# Altium PCB 2020210905jiajunli.PcbDoc
Units mm, origin at the board's own origin, x right, y up, seen from the top; angles counter-clockwise.
Board outline 130 x 100 mm, 2 copper layers (Top Layer, Bottom Layer); 54 components, 39 nets, 173 pads, 12 vias.
Unrouted connection lines stored in the file: 7.
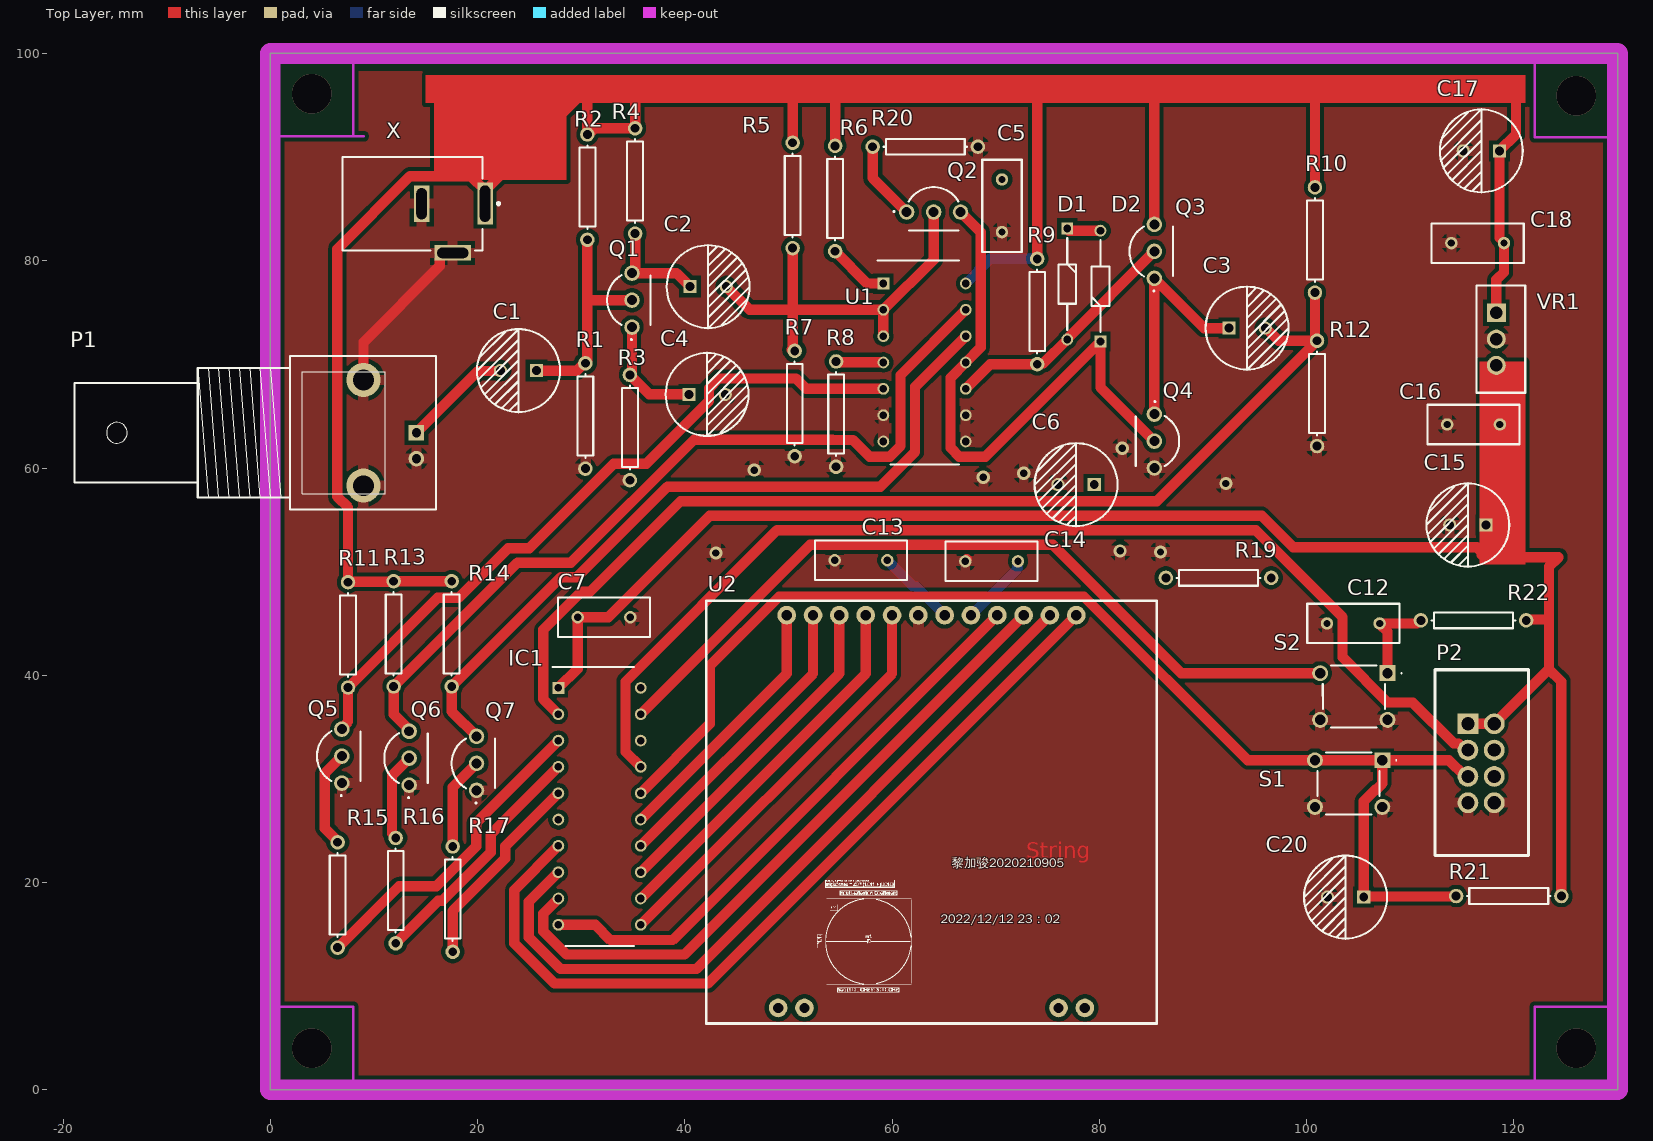
[diagram p0: Top Layer view]
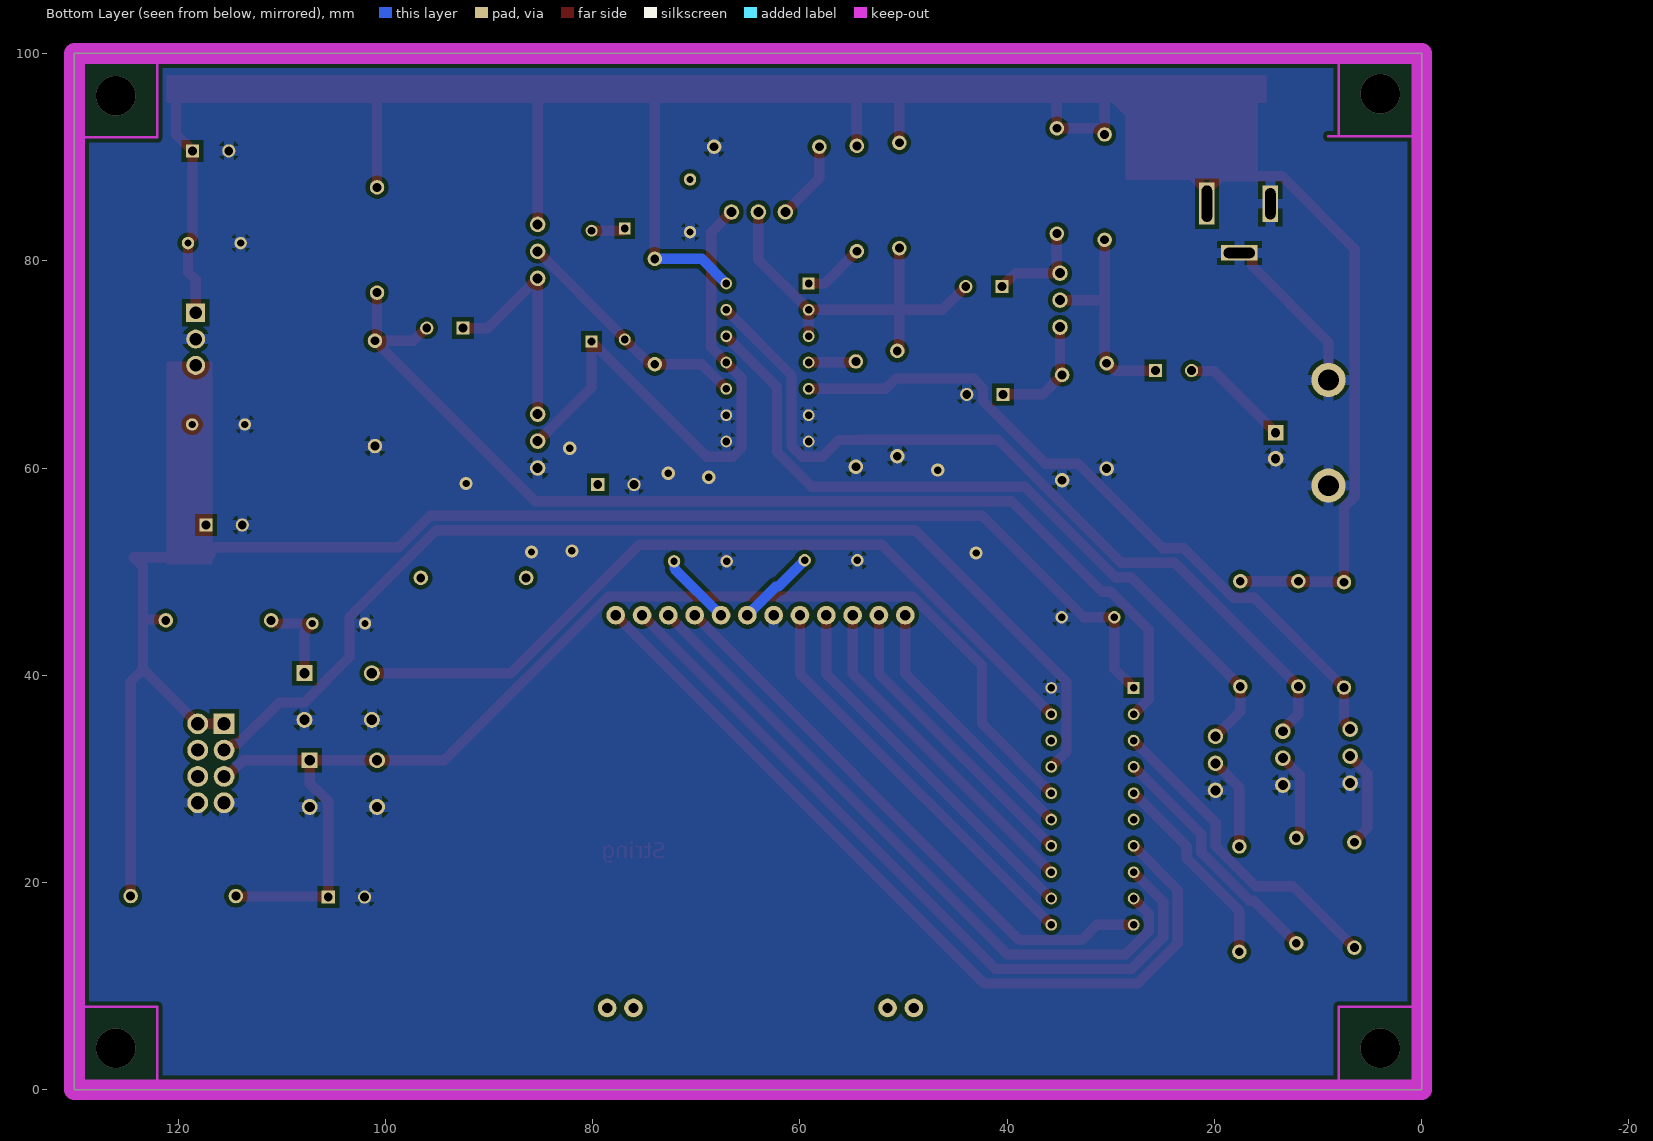
[diagram p1: Bottom Layer view, seen from below]
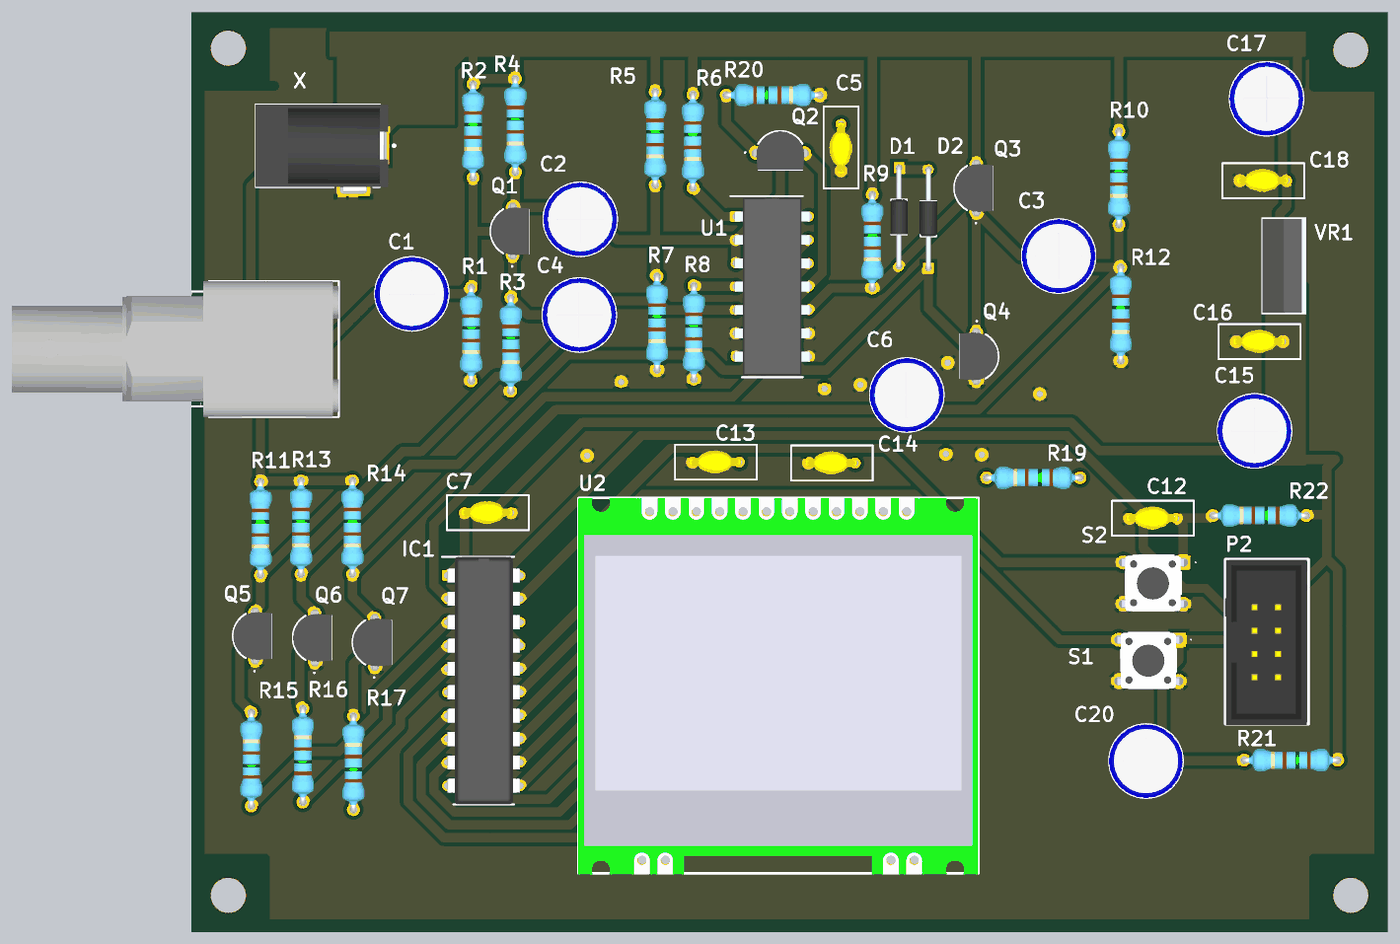
[diagram p2: 3D render of the assembled board from above, using the file's embedded part models]

## Layer stack, top to bottom
Top Solder: solder mask 0.0102, Solder Resist, Dk 3.5
Top Layer: signal copper 0.0356
Dielectric 1: dielectric 0.32, FR-4, Dk 4.8
Bottom Layer: signal copper 0.0356
Bottom Solder: solder mask 0.0102, Solder Resist, Dk 3.5

## Board outline
0,0 130,0 130,100 0,100

## Design rules (kind name [scope] priority, off if disabled: settings)
Clearance Clearance_POLY [InPolygon] p1: gap=0.4 ignorepadtopadclearanceinfootprint=FALSE
Clearance Clearance_1 [All] p2: gap=0.4 ignorepadtopadclearanceinfootprint=FALSE
Clearance Clearance_ANALOG [WithinRoom('ANALOG') vs WithinRoom('ANALOG')] p3: gap=1.2 ignorepadtopadclearanceinfootprint=TRUE
Clearance Clearance_P10 [InNet('P10')] p4: gap=1.2 ignorepadtopadclearanceinfootprint=FALSE
ComponentOrientations [All] p1: allowedrotations=32
HoleSize [All] p1: absolutevalues=TRUE maxlimit=5 minlimit=0.025 maxpercent=80.000 minpercent=20.000
NetsToIgnore [InNet('3V3')] p1:
PermittedLayers [All] p1: toplayerpermitted=TRUE bottomlayerpermitted=FALSE
PolygonConnect [All] p1: connectstyle=Relief reliefconductorwidth=1 reliefentries=4 polygonreliefangle="90 Angle" airgapwidth=0.4
RoomDefinition ANALOG [False vs False] p1: confinementstyle=ConfineIn formatcopy=TRUE lockcomponents=FALSE outline 10.3,95.7 108,95.7 108,54.1 10.3,54.1
RoutingVias [All] p1: holewidth=0.5 width=1 viastyle="Through Hole" minholewidth=0.25 minwidth=0.5 maxholewidth=4 maxwidth=8
SilkToSilkClearance [All] p1: silktosilkclearance=0.2
SilkToSolderMaskClearance [IsPad] p1: minsilkscreentomaskgap=0.2 clearancetoexposedcopper=TRUE
SolderMaskExpansion [All] p1: expansion=0.102 istentingtop=FALSE
Width Width__POWER [All] p1: maxlimit=5 minlimit=1 preferedwidth=1.5
Width Width_ANALOG [WithinRoom('ANALOG')] p2: maxlimit=5 minlimit=0.5 preferedwidth=0.6
Width [InNetClass('POWERClass')] p3: maxlimit=5 minlimit=0.254 preferedwidth=0.4
27 further rules are at their usual default settings.

## Classes and differential pairs
net class POWERClass: 3V3 +12 GND
component class 2020210905-LJJ: C1 C2 C3 C4 C5 C6 D1 D2 P1 Q1 Q2 Q3 Q4 Q5 Q6 Q7 R1 R2 R3 R4 R5 R6 R7 R8 R10 R11 R12 R13 R14 R15 R16 R17 R20 U1
component class 2020210905-DIGTAL: C7 C12 C13 C14 C15 C16 C17 C18 C20 IC1 P2 R19 R21 R22 S1 S2 U2 VR1 X

## Components (designator, comment, footprint, x,y, rotation, side; value= is the part's Value field where it differs from the comment)
C1 "100uF/25V" CAPPRD350W65D800H1250 25.7,69.4 r180 top
C2 "100uF/25V" CAPPRD350W65D800H1250 40.5,77.5 r0 top
C3 "100uF/25V" CAPPRD350W65D800H1250 92.5,73.5 r0 top
C4 "100uF/25V" CAPPRD350W65D800H1250 40.4,67.1 r0 top
C5 "Cap" RAD-0.2-cap 70.6,85.3 r90 top value=100nF
C6 "100uF/25V" CAPPRD350W65D800H1250 79.5,58.4 r180 top
C7 "Cap" RAD-0.2-cap 32.2,45.6 r0 top value=100nF
C12 "Cap" RAD-0.2-cap 104.5,45 r0 top value=100nF
C13 "Cap" RAD-0.2-cap 57,51.1 r0 top value=100nF
C14 "Cap" RAD-0.2-cap 69.6,51 r0 top value=100nF
C15 "100uF/25V" CAPPRD350W65D800H1250 117.3,54.5 r180 top
C16 "Cap" RAD-0.2-cap 116.1,64.2 r0 top value=100nF
C17 "100uF/25V" CAPPRD350W65D800H1250 118.6,90.6 r180 top
C18 "Cap" RAD-0.2-cap 116.5,81.7 r0 top value=100nF
C20 "100uF/25V" CAPPRD350W65D800H1250 105.5,18.6 r180 top
D1 "1N4148" DIOAD1068W53L380D172 76.9,83.1 r270 top
D2 "1N4148" DIOAD1068W53L380D172 80.1,72.2 r90 top
IC1 "MSP430G2553IN20" DIP794W53P254L2540H508Q20N 31.77,27.35 r0 top
P1 "BNC" BNC_RA-CON 14.1,63.4 r0 top
P2 "Header 4X2" IDC-8 115.56,35.32 r270 top
Q1 "SS8050CTA" TO-92-3 34.9,76.2 r90 top
Q2 "SS8050CTA" TO-92-3 64,84.7 r0 top
Q3 "SS8050CTA" TO-92-3 85.3,80.9 r90 top
Q4 "SS8550CTA" TO-92-3 85.3,62.6 r270 top
Q5 "SS8050CTA" TO-92-3 6.9,32.2 r90 top
Q6 "SS8050CTA" TO-92-3 13.4,32 r90 top
Q7 "SS8050CTA" TO-92-3 19.9,31.5 r90 top
R1 "51k" RES-AXIAL-0.4 30.4,65.02 r90 top value=100K
R2 "100k" RES-AXIAL-0.4 30.6,87.1 r90 top value=100K
R3 "1k" RES-AXIAL-0.4 34.7,63.9 r90 top value=100K
R4 "3k" RES-AXIAL-0.4 35.2,87.7 r90 top value=100K
R5 "33k" RES-AXIAL-0.4 50.4,86.3 r90 top value=100K
R6 "20k" RES-AXIAL-0.4 54.5,86 r90 top value=100K
R7 "10k" RES-AXIAL-0.4 50.6,66.22 r90 top value=100K
R8 "18k" RES-AXIAL-0.4 54.6,65.2 r90 top value=100K
R9 "2k" RES-AXIAL-0.4 74,75.1 r90 top value=100K
R10 "11k" RES-AXIAL-0.4 100.8,82 r90 top value=100K
R11 "1k" RES-AXIAL-0.4 7.5,43.9 r90 top value=100K
R12 "1k" RES-AXIAL-0.4 101,67.2 r90 top value=100K
R13 "1k" RES-AXIAL-0.4 11.9,44 r90 top value=100K
R14 "1k" RES-AXIAL-0.4 17.5,44 r90 top value=100K
R15 "1k" RES-AXIAL-0.4 6.5,18.8 r270 top value=100K
R16 "1k" RES-AXIAL-0.4 12.1,19.22 r270 top value=100K
R17 "1k" RES-AXIAL-0.4 17.6,18.4 r270 top value=100K
R19 "1k" RES-AXIAL-0.4 91.5,49.4 r0 top value=100K
R20 "2k" RES-AXIAL-0.4 63.2,91 r180 top value=100K
R21 "1k" RES-AXIAL-0.4 119.5,18.7 r0 top value=100K
R22 "1k" RES-AXIAL-0.4 116.1,45.3 r0 top value=100K
S1 "SW-PB" FSM18JH 107.3,31.8 r0 top
S2 "SW-PB" FSM18JH 107.8,40.2 r0 top
U1 "CD4066BE" DIP794W53P254L1930H508Q14N 63.13,70.18 r0 top
U2 "JLX12864G-086-PC" JLX12864-G-086-PC 63.8,26.8 r0 top
VR1 "UA78M33CKCS" TO254P470X1016X1965-3P 118.3,74.98 r270 top
X "PWR2.5" KOBI-16PJ032_V 14.6,85.5 r180 top

## Footprints (in the part's own frame and the unit in brackets; to place one, negate y for a bottom-side part, rotate by r counter-clockwise, add the part's x,y. Pads: shape width x height; smd on the part's side, far side on the other; paste and mask are expansions set on the pad)
BNC_RA-CON [mm] "Connector; BNC Elbow"
  rect 1.5x1.5 hole 0.9: 1(0,0)
  round 3.3 hole 2: 2(-5.1,-5.1) 2(-5.1,5.1)
  round 1.5 hole 0.9: 2(0,-2.5)
  silkscreen extent -33,-7.4 1.9,7.4, body extent -33.66,-7.38 1.9,7.38, height 16.12
CAPPRD350W65D800H1250 [mm]
  rect 1.275x1.275 hole 0.85: 1(0,0)
  round 1.275 hole 0.85: 2(3.5,0)
  silkscreen extent -2.25,-4.03 5.75,4.03, body extent -2.28,-4.03 5.78,4.03, height 12.03
DIOAD1068W53L380D172 [mm]
  rect 1.15x1.15 hole 0.75: 1(0,0)
  round 1.15 hole 0.75: 2(10.7,0)
  silkscreen extent 0.93,-0.86 9.77,0.86, body extent -0.27,-0.95 10.95,0.95, height 1.91
DIP794W53P254L1930H508Q14N [mm]
  rect 1.13x1.13 hole 0.73: 1(-3.97,7.62)
  round 1.13 hole 0.73: 2(-3.97,5.08) 3(-3.97,2.54) 4(-3.97,0) 5(-3.97,-2.54) 6(-3.97,-5.08) 7(-3.97,-7.62) 8(3.97,-7.62) 9(3.97,-5.08) 10(3.97,-2.54) 11(3.97,0) 12(3.97,2.54) 13(3.97,5.08) 14(3.97,7.62)
  silkscreen extent -4.53,-9.85 3.3,9.85, body extent -4.1,-9.65 4.1,9.65, height 5.08
DIP794W53P254L2540H508Q20N [mm]
  rect 1.13x1.13 hole 0.73: 1(-3.97,11.43)
  round 1.13 hole 0.73: 2(-3.97,8.89) 3(-3.97,6.35) 4(-3.97,3.81) 5(-3.97,1.27) 6(-3.97,-1.27) 7(-3.97,-3.81) 8(-3.97,-6.35) 9(-3.97,-8.89) 10(-3.97,-11.43) 11(3.97,-11.43) 12(3.97,-8.89) 13(3.97,-6.35) 14(3.97,-3.81) 15(3.97,-1.27) 16(3.97,1.27) 17(3.97,3.81) 18(3.97,6.35) 19(3.97,8.89) 20(3.97,11.43)
  silkscreen extent -4.54,-13.46 3.3,13.46, body extent -3.94,-13.46 3.94,13.46, height 5.27
FSM18JH [mm]
  round 1.54 hole 0.99: 1(-6.5,0) 2(-6.5,-4.5) 2(0,-4.5)
  rect 1.54x1.54 hole 0.99: 1(0,0)
  silkscreen extent -6.25,-5.25 1.4,0.75, body extent -7.17,-5.3 0.57,0.73, height 5.01
IDC-8 [mm]
  rect 2x2 hole 1.27: 1(0,0)
  round 2 hole 1.27: 2(0,2.54) 3(2.54,0) 4(2.54,2.54) 5(5.08,0) 6(5.08,2.54) 7(7.62,0) 8(7.62,2.54)
  silkscreen extent -5.21,-3.18 12.7,5.84, body extent -5.17,-3.23 12.79,5.67, height 9
JLX12864-G-086-PC [mm]
  round 1.8 hole 1: 1(13.97,19) 2(11.43,19) 3(8.89,19) 4(6.35,19) 5(3.81,19) 6(1.27,19) 7(-1.27,19) 8(-3.81,19) 9(-6.35,19) 10(-8.89,19) 11(-11.43,19) 12(-13.97,19) 13(14.8,-18.9) 14(12.26,-18.9) 15(-12.26,-18.9) 16(-14.8,-18.9)
  silkscreen extent -21.75,-20.4 21.75,20.4, body extent -21.8,-20.5 21.7,20.39, height 3.5
KOBI-16PJ032_V [mm]
  rect 1.5x4.05 hole 0.991 slot 3.505 at 90 deg: 1(-6.121,0)
  rect 3.5x1.5 hole 0.991 slot 2.997 at 0 deg: 2(-2.997,4.75)
  rect 1.5x3.5 hole 0.991 slot 2.997 at 90 deg: 3(0,0)
  silkscreen extent -7.55,-4.5 7.62,4.5, body extent -6.78,-4.5 7.62,5, height 11
RAD-0.2-cap [mm] "Radial Cap, Thru-Hole; 2 Leads; 0.2 in Pin Spacing"
  round 1.2 hole 0.7: 1(-2.54,0) 2(2.54,0)
  silkscreen extent -4.44,-1.9 4.45,1.91, body extent -2.88,-1.23 2.72,1.27, height 6
RES-AXIAL-0.4 [mm]
  round 1.4 hole 0.85: 1(-5.08,0) 2(5.08,0)
  silkscreen extent -4.04,-0.76 4.04,0.76, body extent -5.38,-1.2 5.38,1.2, height 2.41
TO254P470X1016X1965-3P [mm]
  rect 1.83x1.83 hole 1.22: 1(0,0)
  round 1.83 hole 1.22: 2(2.54,0) 3(5.08,0)
  silkscreen extent -2.64,-1.91 7.72,2.79, body extent -2.54,-1.91 7.62,2.79, height 19.35
TO-92-3 [mm]
  round 1.5 hole 0.96: 1(-2.6,0) 2(0,0) 3(2.6,0)
  silkscreen extent -3.85,-1.79 2.41,2.4, body extent -3.08,-1.83 3.08,2.36, height 9.78

## Part data
C1 C2 C3 C4 C6 C15 C17 C20: library part ECA-1EEN101, "Capacitor Polarised", Manufacturer_Name=Panasonic, Mouser Part Number=667-ECA-1EEN101, Datasheet Link=https://www.mouser.in/datasheet/2/315/ABA0000C1044-947503.pdf, Height=12.5mm, Manufacturer_Part_Number=ECA-1EEN101, Mouser Price/Stock=https://www.mouser.co.uk/ProductDetail/Panasonic/ECA-1EEN101?qs=tfZGHB2PWd0NYnCl82fG3g%3D%3D
C5 C7 C12 C13 C14 C16 C18: "Capacitor", LatestRevisionDate=17-Jul-2002, LatestRevisionNote="Re-released for DXP Platform.", PackageDescription="Radial Cap, Thru-Hole; 2 Leads; 0.3 in Pin Spacing", PackageReference=RAD-0.3, Published=8-Jun-2000, Publisher="Altium Limited"
D1 D2: "Diode", Manufacturer_Name=onsemi, Mouser Part Number=512-1N4148, Arrow Part Number=1N4148, Arrow Price/Stock=https://www.arrow.com/en/products/1n4148/on-semiconductor?region=europe, Manufacturer_Part_Number=1N4148, Mouser Price/Stock=https://www.mouser.co.uk/ProductDetail/ON-Semiconductor-Fairchild/1N4148?qs=i4Fj9T%2FoRm8RMUhj5DeFQg%3D%3D
IC1: "Integrated Circuit", Manufacturer_Name="Texas Instruments", Mouser Part Number=595-MSP430G2553IN20, Arrow Part Number=MSP430G2553IN20, Arrow Price/Stock=https://www.arrow.com/en/products/msp430g2553in20/texas-instruments?region=nac, Datasheet Link=http://www.ti.com/lit/ds/symlink/msp430g2553.pdf, Height=5.08mm, Manufacturer_Part_Number=MSP430G2553IN20, Mouser Price/Stock=https://www.mouser.co.uk/ProductDetail/Texas-Instruments/MSP430G2553IN20?qs=cBe3DO7yhR7KujMhn3Ev6Q%3D%3D
P1: "BNC Elbow Connector", LatestRevisionDate=17-Jul-2002, LatestRevisionNote="Re-released for DXP Platform.", Publisher="Altium Limited"
P2: "Header, 4-Pin, Dual row", LatestRevisionDate=17-Jul-2002, LatestRevisionNote="Re-released for DXP Platform.", Publisher="Altium Limited"
Q1 Q2 Q3 Q5 Q6 Q7: "Transistor BJT NPN", Manufacturer_Name=onsemi, Mouser Part Number=512-SS8050CTA, Arrow Part Number=SS8050CTA, Arrow Price/Stock=https://www.arrow.com/en/products/ss8050cta/on-semiconductor?region=europe, Datasheet Link=http://www.onsemi.com/pub/Collateral/SS8050-D.pdf, Manufacturer_Part_Number=SS8050CTA, Mouser Price/Stock=https://www.mouser.co.uk/ProductDetail/ON-Semiconductor-Fairchild/SS8050CTA?qs=UMEuL5FsraCvGU9pAIJ0vg%3D%3D
Q4: "Transistor BJT PNP", Manufacturer_Name=onsemi, Mouser Part Number=512-SS8550CTA, Arrow Part Number=SS8550CTA, Arrow Price/Stock=https://www.arrow.com/en/products/ss8550cta/on-semiconductor?region=nac, Datasheet Link=https://www.onsemi.com/pub/Collateral/SS8550-D.pdf, Manufacturer_Part_Number=SS8550CTA, Mouser Price/Stock=https://www.mouser.co.uk/ProductDetail/ON-Semiconductor-Fairchild/SS8550CTA?qs=UMEuL5FsraCgmcObR%2FdvUQ%3D%3D
R1 R2 R3 R4 R5 R6 R7 R8 R9 R10 R11 R12 R13 R14 R15 R16 R17 R19 R20 R21 R22: library part Res1, "Resistor", LatestRevisionDate=17-Jul-2002, LatestRevisionNote="Re-released for DXP Platform.", PackageDescription="Axial Device, Thru-Hole; 2 Leads; 0.3 in Pin Spacing", PackageReference=AXIAL-0.3, Published=8-Jun-2000, Publisher="Altium Limited"
S1 S2: "Switch", LatestRevisionDate=17-Jul-2002, LatestRevisionNote="Re-released for DXP Platform.", PackageDescription="Switch; 2 Leads", PackageReference=SPST-2, Published=24-Mar-1999, Publisher="Altium Limited"
U1: "Integrated Circuit", Manufacturer_Name="Texas Instruments", Mouser Part Number=595-CD4066BE, Arrow Part Number=CD4066BE, Arrow Price/Stock=https://www.arrow.com/en/products/cd4066be/texas-instruments?region=nac, Datasheet Link=https://datasheet.datasheetarchive.com/originals/distributors/Datasheets-SFU2/DSASFU100028824.pdf, Height=5.08mm, Manufacturer_Part_Number=CD4066BE, Mouser Price/Stock=https://www.mouser.co.uk/ProductDetail/Texas-Instruments/CD4066BE?qs=mTHRaKC2c7ObpofRtjqLig%3D%3D
U2: "LCD 128*64"
VR1: library part "Volt Reg", "Voltage Regulator", LatestRevisionDate=29-May-2009, LatestRevisionNote="IPC-7351 Footprint Added.", PackageDescription="3-Pin Transistor Outline Package 2.54 mm Pitch, 15.1 mm Lead Span", PackageReference=D2PAK, Published=24-Mar-1999, Publisher="Altium Limited"
X: "Low Voltage Power Supply Connector", ComponentLink1Description="Manufacturer Link", ComponentLink1URL=http://domino.kycon.com/internet/Products.html, DatasheetDocument=09-May-2002, Published=17-Dec-2003, Publisher="Altium Limited"

## Via types
v1: diameter 1.27, hole 0.711, Top Layer to Bottom Layer, 8 vias
v2: diameter 3.8, hole 3.8, Top Layer to Bottom Layer, 4 vias

## Nets (pads, with @x,y where several pads share a name; then routed paths per layer and width w, separated by ;. In a path a pad name is that pad's centre, name@x,y a point inside that pad or via, vN(x,y) a via of type N, cw(c..) or ccw(c..) an arc to the next point about the centre after c; other vN are vias at no path point)
3V3: C7.1 C13.2 C14.2 C15.1 C16.2 IC1.1 P2.1 P2.2 R19.2 R21.2 R22.2 U2.5 U2.6 VR1.3 | length 166
  Top Layer w1: IC1.1 29.66,40.64 C7.1 32.619,45.6 42.419,55.4 95.661,55.4 98.699,52.362 116.4,52.362 116.9,51.862 116.9,51.6 ; P2.1 P2.2 123.38,40.6 ; 119.8,51.8 120.2,51.4 124.3,51.4 123.38,50.48 123.38,45.54 ; R22.2 121.257,45.377 123.217,45.377 123.38,45.54 ; R21.2 124.58,39.4 123.38,40.6 ; 123.38,40.6 123.38,45.54
  Bottom Layer w1: C13.2 62.077,48.563 62.313,48.563 65.07,45.806 U2.6 ; U2.5 67.61,45.806 72.102,50.297 72.102,50.962 C14.2
+12: C5.2 C6.1 C17.1 C18.2 Q3.3 R2.2 R4.2 R5.2 R6.2 R9.2 R10.2 R11.2 R13.2 R14.2 U1.14 VR1.1 X.1 | length 249
  Top Layer w1: R14.2 R13.2 11.85,49.03 7.55,49.03 R11.2 7.5,56.194 6.45,57.244 6.45,81.123 13.477,88.15 19.346,88.15 X.1@20.721,86.775 ; X.1 X.1@20.721,86.775 ; R5.2 50.4,96.1 ; R6.2 54.5,96.1 ; R9.2 74,95.9 73.8,96.1 ; Q3.3 85.3,95.8 85,96.1 ; R10.2 100.8,95.9 100.6,96.1 ; VR1.1 118.3,78.15 119.04,78.89 C18.2 ; 118.6,82.194 C17.1 120.2,92.2 120.2,95.514 119.614,96.1 100.6,96.1 ; X.1@20.721,86.775 30.046,96.1 30.6,95.546 R2.2 30.708,92.18 31.308,92.78 R4.2 35.2,96 35.1,96.1 50.4,96.1 ; 50.4,96.1 54.5,96.1 ; 54.5,96.1 73.8,96.1 ; 73.8,96.1 85,96.1 ; 85,96.1 100.6,96.1
  Bottom Layer w1: U1.14 69.48,80.18 R9.2
CROSS1: D1.2 Q3.2 R9.1 U1.10 | length 23.1
  Top Layer w1: U1.10 69.48,70.02 R9.1 ; R9.1@74.597,70.097 D1.2 76.929,72.429 76.929,72.529 Q3.2
CROSS2: D2.1 Q2.3 Q4.2 U1.11 | length 55.9
  Top Layer w1: Q2.3 68.565,82.735 68.565,71.645 U1.11 65.635,68.715 65.635,61.953 66.493,61.095 68.995,61.095 D2.1 80.1,67.8 Q4.2
CROSS_C: Q7.3 R14.1 U1.12 | length 73.1
  Top Layer w1: Q7.3 17.5,36.5 R14.1 28.048,49.468 29.591,49.468 38.323,58.2 58.852,58.2 62.213,61.562 62.213,67.833 U1.12
DOWN: R8.2 U1.4 | length 4.6
  Top Layer w1: R8.2 54.675,70.205 59.135,70.205 U1.4
DOWN_C: Q5.3 R11.1 U1.5 | length 69.4
  Top Layer w1: Q5.3 6.9,34.935 7.5,35.535 R11.1 16.16,47.48 18.163,47.48 22.951,52.268 24.991,52.268 33.143,60.42 36.268,60.42 42.337,66.489 42.337,67.711 43.263,68.638 50.695,68.638 51.693,67.64 U1.5
GND: C4.2 C5.1 C6.2 C7.2 C12.1 C13.1 C14.1 C15.2 C16.1 C17.2 C18.1 C20.2 IC1.20 P1.2 P2.7 P2.8 Q4.3 Q5.1 Q6.1 Q7.1 R1.1 R3.1 R7.1 R8.1 R12.1 R20.1 S1.2 S2.2 U1.6 U1.7 U1.8 U1.9 U2.7 VR1.2 X.2 X.3 | length 16.7
  Top Layer w1: P1.2@9,68.5 9,72.153 16.347,79.5 16.347,80.5 16.597,80.75 X.2 ; C14.1 67.06,51.06 C14.1@67.2,51.2
  other v1: 43,51.8 85.9,51.9 82,52 92.2,58.5 68.8,59.1 72.7,59.5 46.7,59.8 82.2,61.9
IN: C1.2 P1.1 | length 10.6
  Top Layer w1: P1.1 20.063,69.363 22.163,69.363 C1.2
NetC1_1: C1.1 Q1.2 R1.2 R2.1 | length 21.3
  Top Layer w1: C1.1 29.592,69.4 30.292,70.1 R1.2 30.4,70.208 30.6,70.408 30.6,76.214 ; R2.1 30.6,76.214 ; Q1.2 30.614,76.2 30.6,76.214
NetC2_1: C2.1 Q1.3 R4.1 | length 10.1
  Top Layer w1: R4.1 35.2,79.235 34.9,78.935 Q1.3 39.2,78.8 C2.1
NetC3_1: C3.1 Q3.1 Q4.1 | length 22.3
  Top Layer w1: Q4.1 Q3.1 90.1,73.5 C3.1
NetC4_1: C4.1 Q1.1 R3.2 | length 11.2
  Top Layer w1: Q1.1 34.9,69.288 34.7,69.088 R3.2 36.58,67.1 C4.1
NetD1_1: D1.1 D2.2 | length 3.3
  Top Layer w1: D1.1 77.1,82.9 D2.2
NetQ2_1: Q2.1 R20.2 | length 7.7
  Top Layer w1: R20.2 58.12,87.98 Q2.1
NetQ5_2: Q5.2 R15.1 | length 9.5
  Top Layer w1: R15.1 6.5,23.988 5.25,25.238 5.25,30.55 Q5.2
NetQ6_2: Q6.2 R16.1 | length 8.5
  Top Layer w1: R16.1 12.1,24.408 11.75,24.758 11.75,30.35 Q6.2
NetQ7_2: Q7.2 R17.1 | length 9
  Top Layer w1: R17.1 17.6,29.2 Q7.2
OUT: C2.2 Q2.2 R5.1 R7.2 U1.2 U1.3 | length 40.2
  Top Layer w1: C2.2 46.24,75.26 50.4,75.26 ; R7.2@50.3,71.4 R7.2@50.377,71.477 ; R5.1 50.4,75.26 ; R7.2 50.6,71.408 50.4,71.608 50.4,75.26 ; U1.3 U1.2 ; Q2.2 64,80.1 U1.2 ; 50.4,75.26 U1.2
P10: C3.2 IC1.2 R10.1 R12.2 | length 105.2
  Top Layer w1: IC1.2 26.335,37.705 26.335,44.396 30.007,48.068 30.848,48.068 36.88,54.1 39.58,56.8 85.52,56.8 R12.2 ; C3.2 96.074,73.5 97.294,72.28 R12.2 ; R10.1 100.8,72.588 101,72.388 R12.2
P11: IC1.3 R15.2 | length 30.9
  Top Layer w1: R15.2 12.42,19.64 16.023,19.64 19.888,23.505 19.888,25.788 IC1.3
P12: IC1.4 R16.2 | length 23.8
  Top Layer w1: R16.2 16.2,18.24 16.603,18.24 21.288,22.925 21.288,24.648 IC1.4
P13: IC1.5 R17.2 | length 19.5
  Top Layer w1: R17.2 17.6,17.257 22.688,22.345 22.688,23.508 IC1.5
P14: IC1.6
P15: IC1.7 U2.1 | length 81.7
  Top Layer w1: IC1.7 23.535,19.275 23.535,14.153 27.433,10.255 42.231,10.255 77.77,45.794 U2.1
P16: IC1.14 U2.11 | length 29.1
  Top Layer w1: IC1.14 52.37,40.17 U2.11
P17: IC1.15 U2.12 | length 25.6
  Top Layer w1: IC1.15 49.83,40.17 U2.12
P20: IC1.8 U2.2 | length 73.2
  Top Layer w1: IC1.8 24.935,18.135 24.935,14.733 28.013,11.655 41.091,11.655 75.23,45.794 U2.2
P21: IC1.9 U2.3 | length 64.6
  Top Layer w1: IC1.9 26.335,16.995 26.335,15.313 28.593,13.055 39.951,13.055 72.69,45.794 U2.3
P22: IC1.10 U2.4 | length 55.9
  Top Layer w1: IC1.10 31.358,15.92 32.823,14.455 38.811,14.455 70.15,45.794 U2.4
P23: IC1.11 U2.8 | length 39.9
  Top Layer w1: IC1.11 59.99,40.17 U2.8
P24: IC1.12 U2.9 | length 36.3
  Top Layer w1: IC1.12 57.45,40.17 U2.9
P25: IC1.13 U2.10 | length 32.7
  Top Layer w1: IC1.13 54.91,40.17 U2.10
P26: C12.2 IC1.19 R22.1 S2.1 | length 86.7
  Top Layer w1: IC1.19 52.1,52.6 75.495,52.6 87.895,40.2 S2.1@101.3,40.2 ; S2.1@107.8,40.2 107.8,44.186 107.04,44.946 C12.2 110.612,45 110.912,45.3 R22.1
P27: IC1.18
RST-WTDIO: C20.1 IC1.16 P2.5 R21.1 S1.1 | length 121.1
  Top Layer w1: IC1.16 42.425,35.305 42.425,40.94 49.084,47.6 78.516,47.6 94.316,31.8 S1.1@107.3,31.8 ; R21.1 114.37,18.65 105.55,18.65 C20.1 105.5,27.862 106.608,28.97 106.714,28.97 107.3,29.556 S1.1@107.3,31.8 ; P2.5 115.289,30.24 113.729,31.8 S1.1@107.3,31.8
UP: R6.1 U1.1 | length 6
  Top Layer w1: R6.1 57.62,77.8 U1.1
UP_C: Q6.3 R13.1 U1.13 | length 80.6
  Top Layer w1: Q6.3 13.4,34.735 11.9,36.235 R13.1 23.848,50.868 29.011,50.868 40.883,62.74 54.243,62.74 54.277,62.706 56.217,62.706 57.827,61.095 59.767,61.095 60.813,62.142 60.813,68.973 U1.13
WTCK: IC1.17 P2.3 R19.1 | length 107.2
  Top Layer w1: IC1.17 34.275,32.625 34.275,39.387 48.888,54 95.081,54 103.46,45.621 103.46,41.727 107.817,37.37 110.237,37.37 114.187,33.42 114.649,33.42 115.289,32.78 P2.3
pads on no net: P2.4 P2.6 U2.13 U2.14 U2.15 U2.16
copper on no net:
  other v2: 4,4 126,4 126,95.9 4,96.1

## Polygon pours and split planes (outlines as drawn)
GND on Bottom Layer "GND_L02_P001" (solid, remove dead copper, pour order 1): 1,98.9 1.1,99 129,99 129,1 128.9,0.9 0.9,0.9
GND on Top Layer "GND_L01_P002" (solid, remove dead copper, pour order 2): 1.4,98.3 128.3,98.3 128.6,98.6 128.6,1.4 1.4,1.4 1,1.8

## Keep-outs
Keep-Out Layer:
  lines w0.254: 0,92.1 0,100.1 8,100.1 8,92.1 ; 1,92 9,92 ; 0,0 8,0 8,8 0,8 0,0 ; 122,0 122,8 130,8 130,0 122,0 ; 122,91.9 122,99.9 130,99.9 130,91.9 122,91.9
  lines w2: 0,0 0,100 130,100 130,0 0,0

## Other copper
Top Layer:
  rectangle net 3V3: 116.7,50.7 121.1,70.3
  rectangle net +12: 15.8,87.8 28.6,96.2
  rectangle net +12: 15,95.2 121.1,97.9
  text "String" at 72.954,22.362 h1.52

## Silkscreen, mask and mechanical layers (free items; w line width, h text height)
Top Overlay:
  drawing of 160 lines, arcs and shapes, not listed
  text "黎加骏2020210905" at 65.754,21.133 h1.52
  text "2022/12/12 23：02" at 64.699,15.721 h1.52
Mechanical 1:
  the board outline again, w0.254